# Altium PCB PCB1.PcbDoc (part 1 of 3)
Units mm, origin at the board's own origin, x right, y up, seen from the top; angles counter-clockwise.
Board outline 65.15 x 55.25 mm, 4 copper layers (Top Layer, Int1 (GND), Int2 (PWR), Bottom Layer), stack 1.369 mm thick; 135 components, 113 nets, 463 pads, 324 vias.
Unrouted connection lines stored in the file: 1.
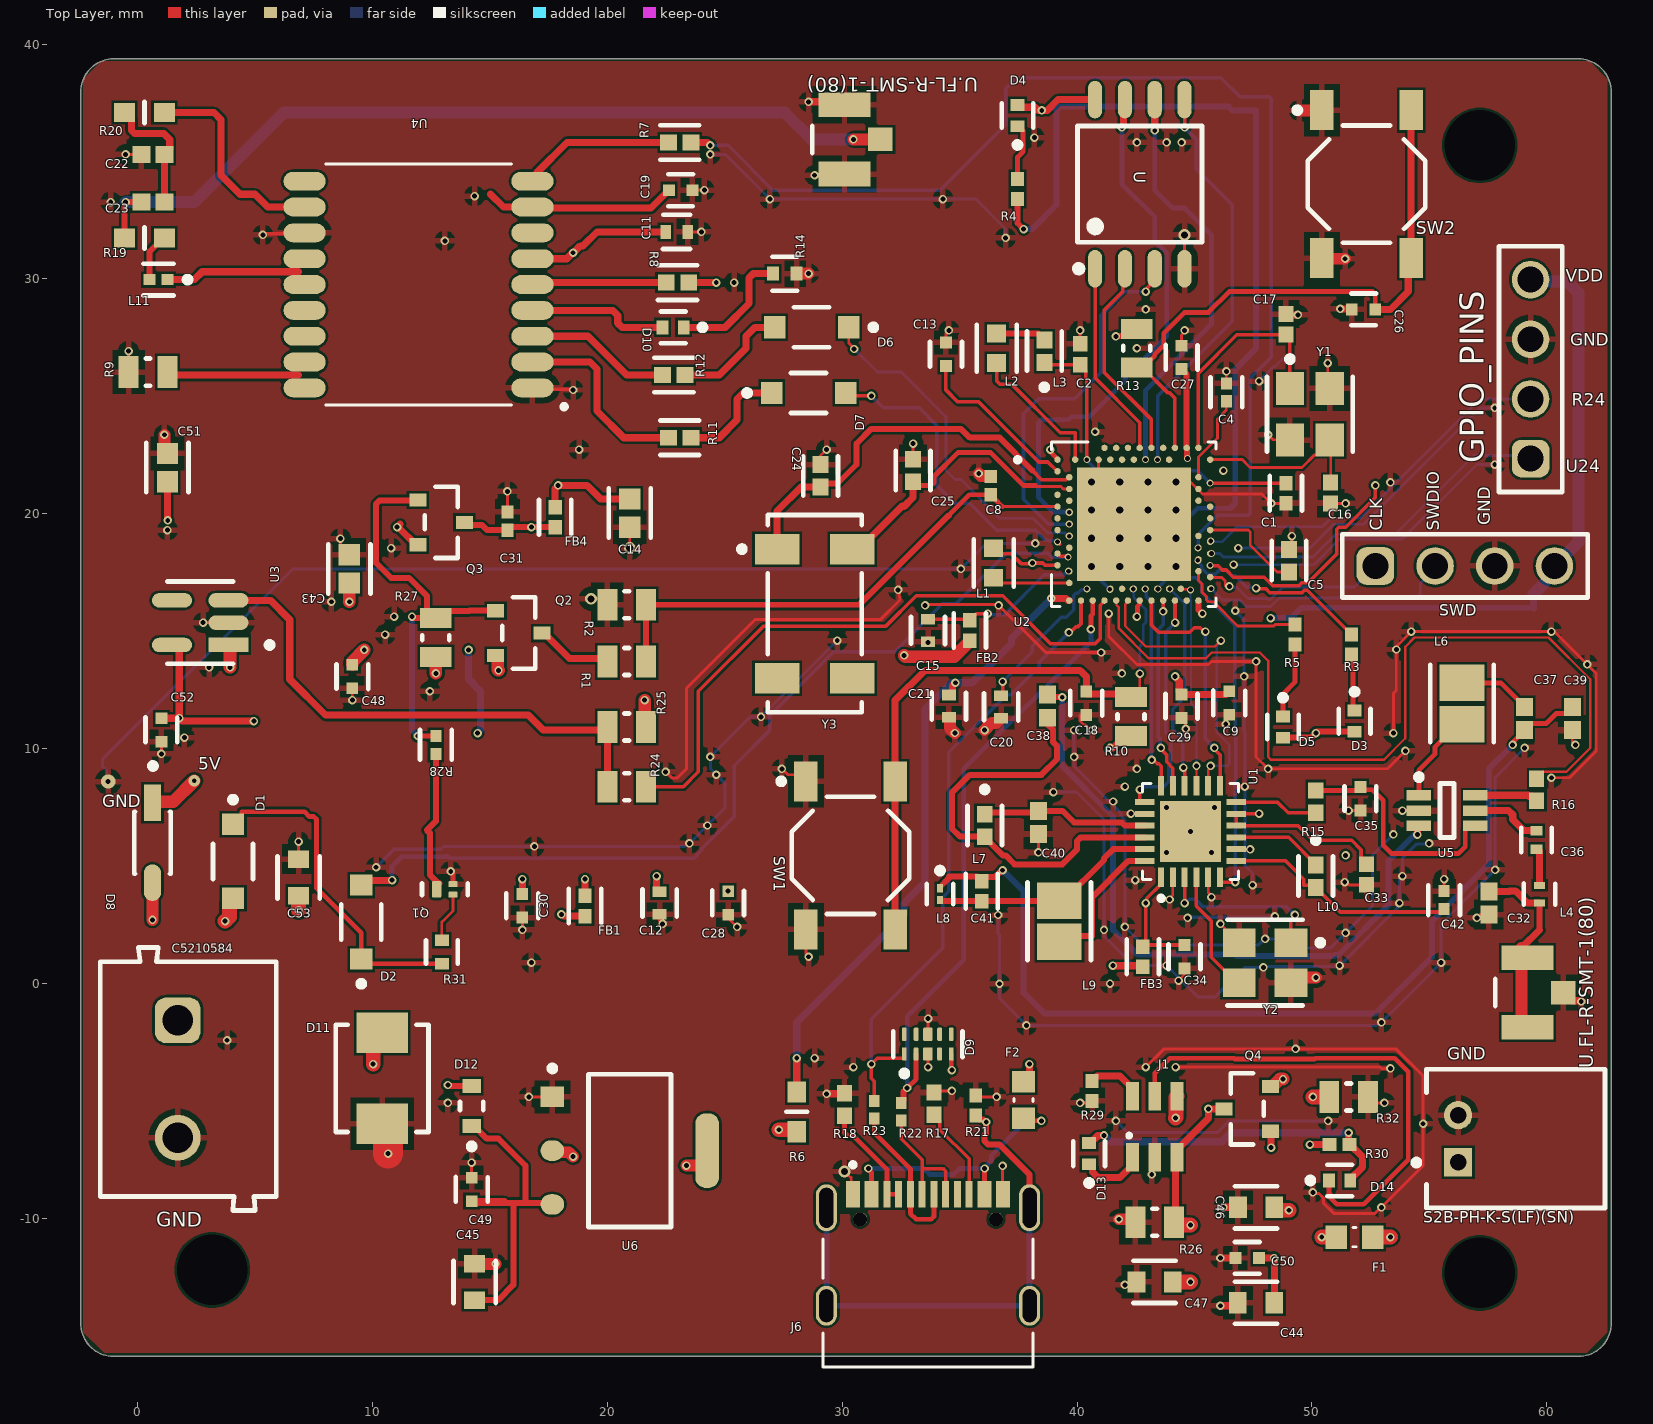
[diagram p0: Top Layer view]
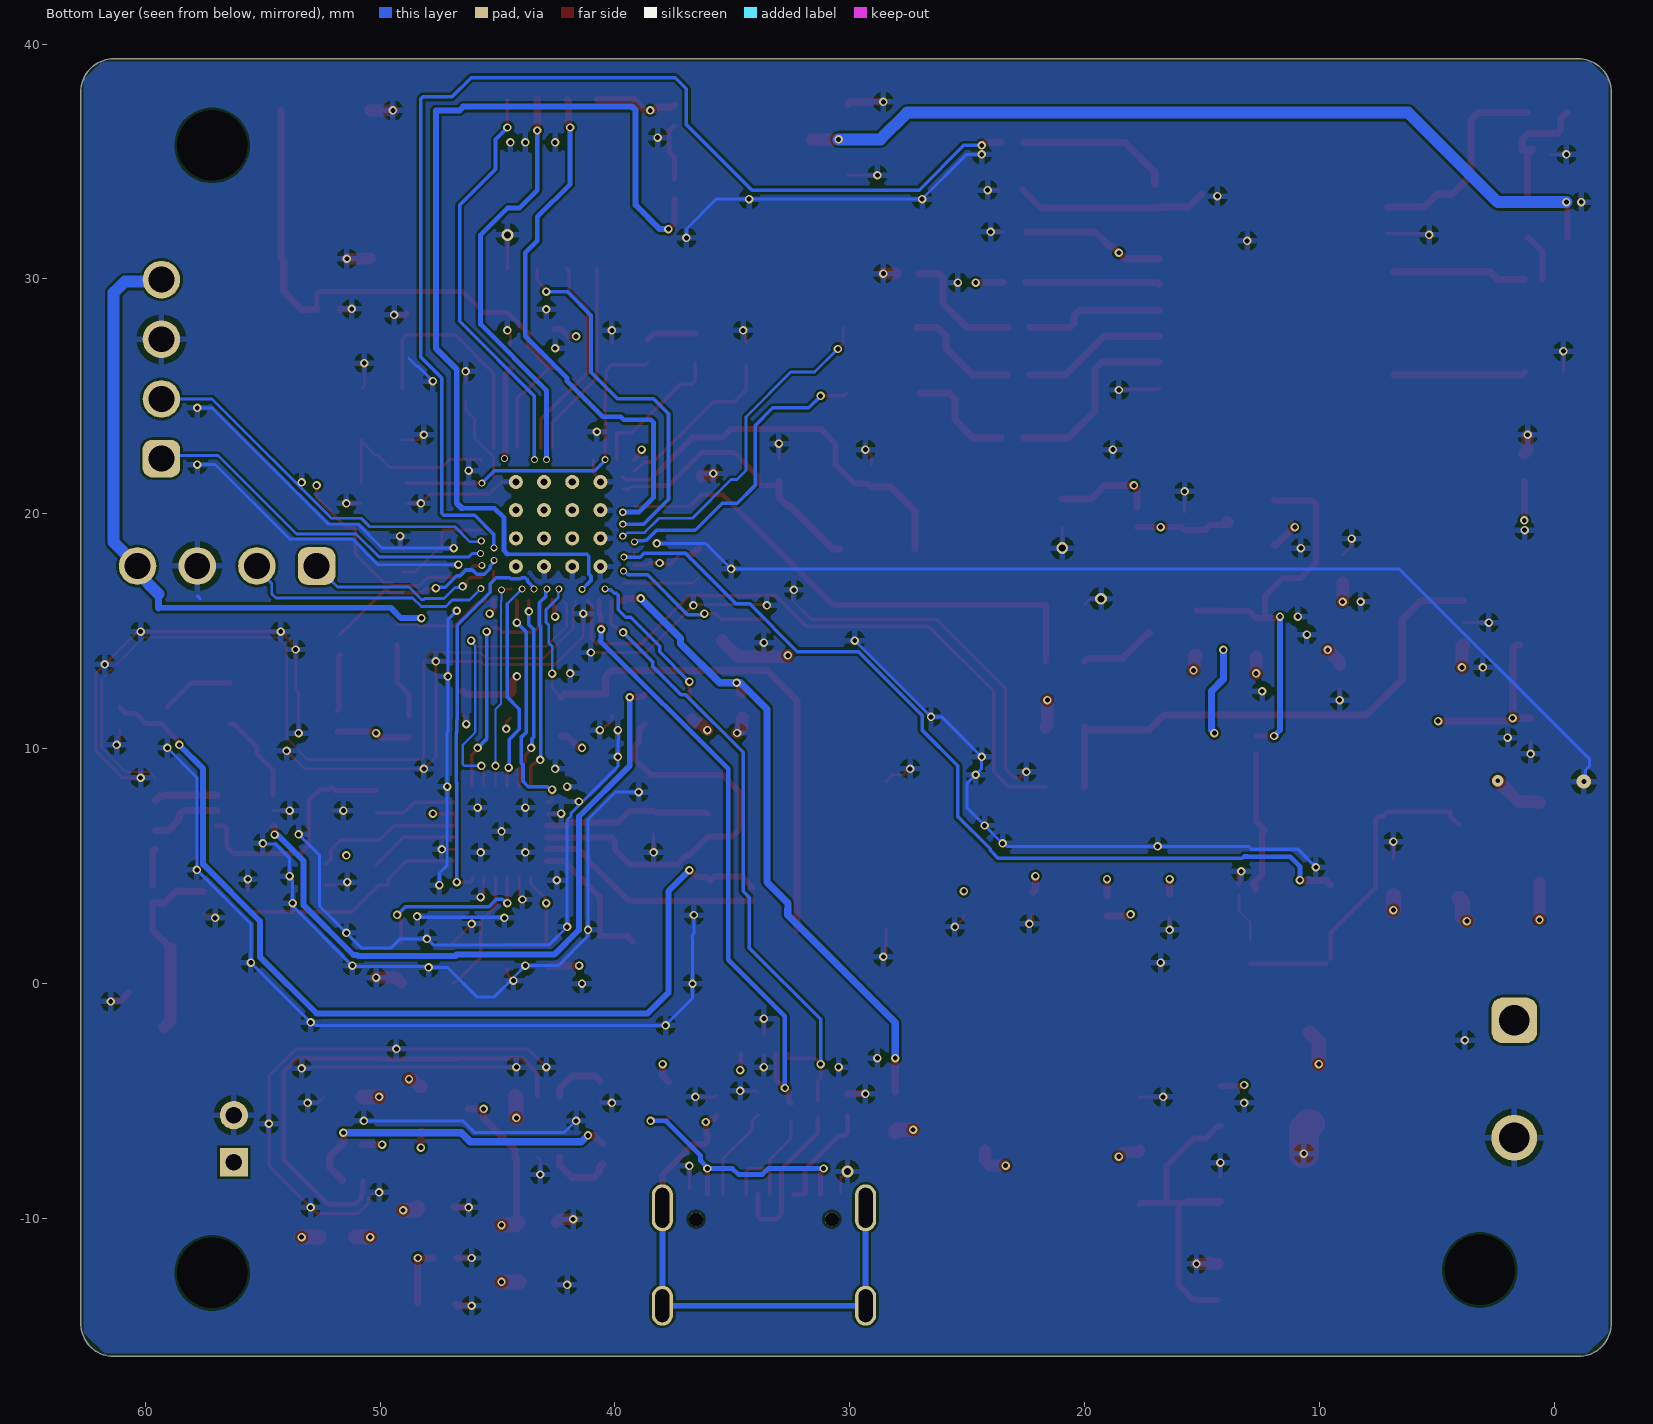
[diagram p1: Bottom Layer view, seen from below]
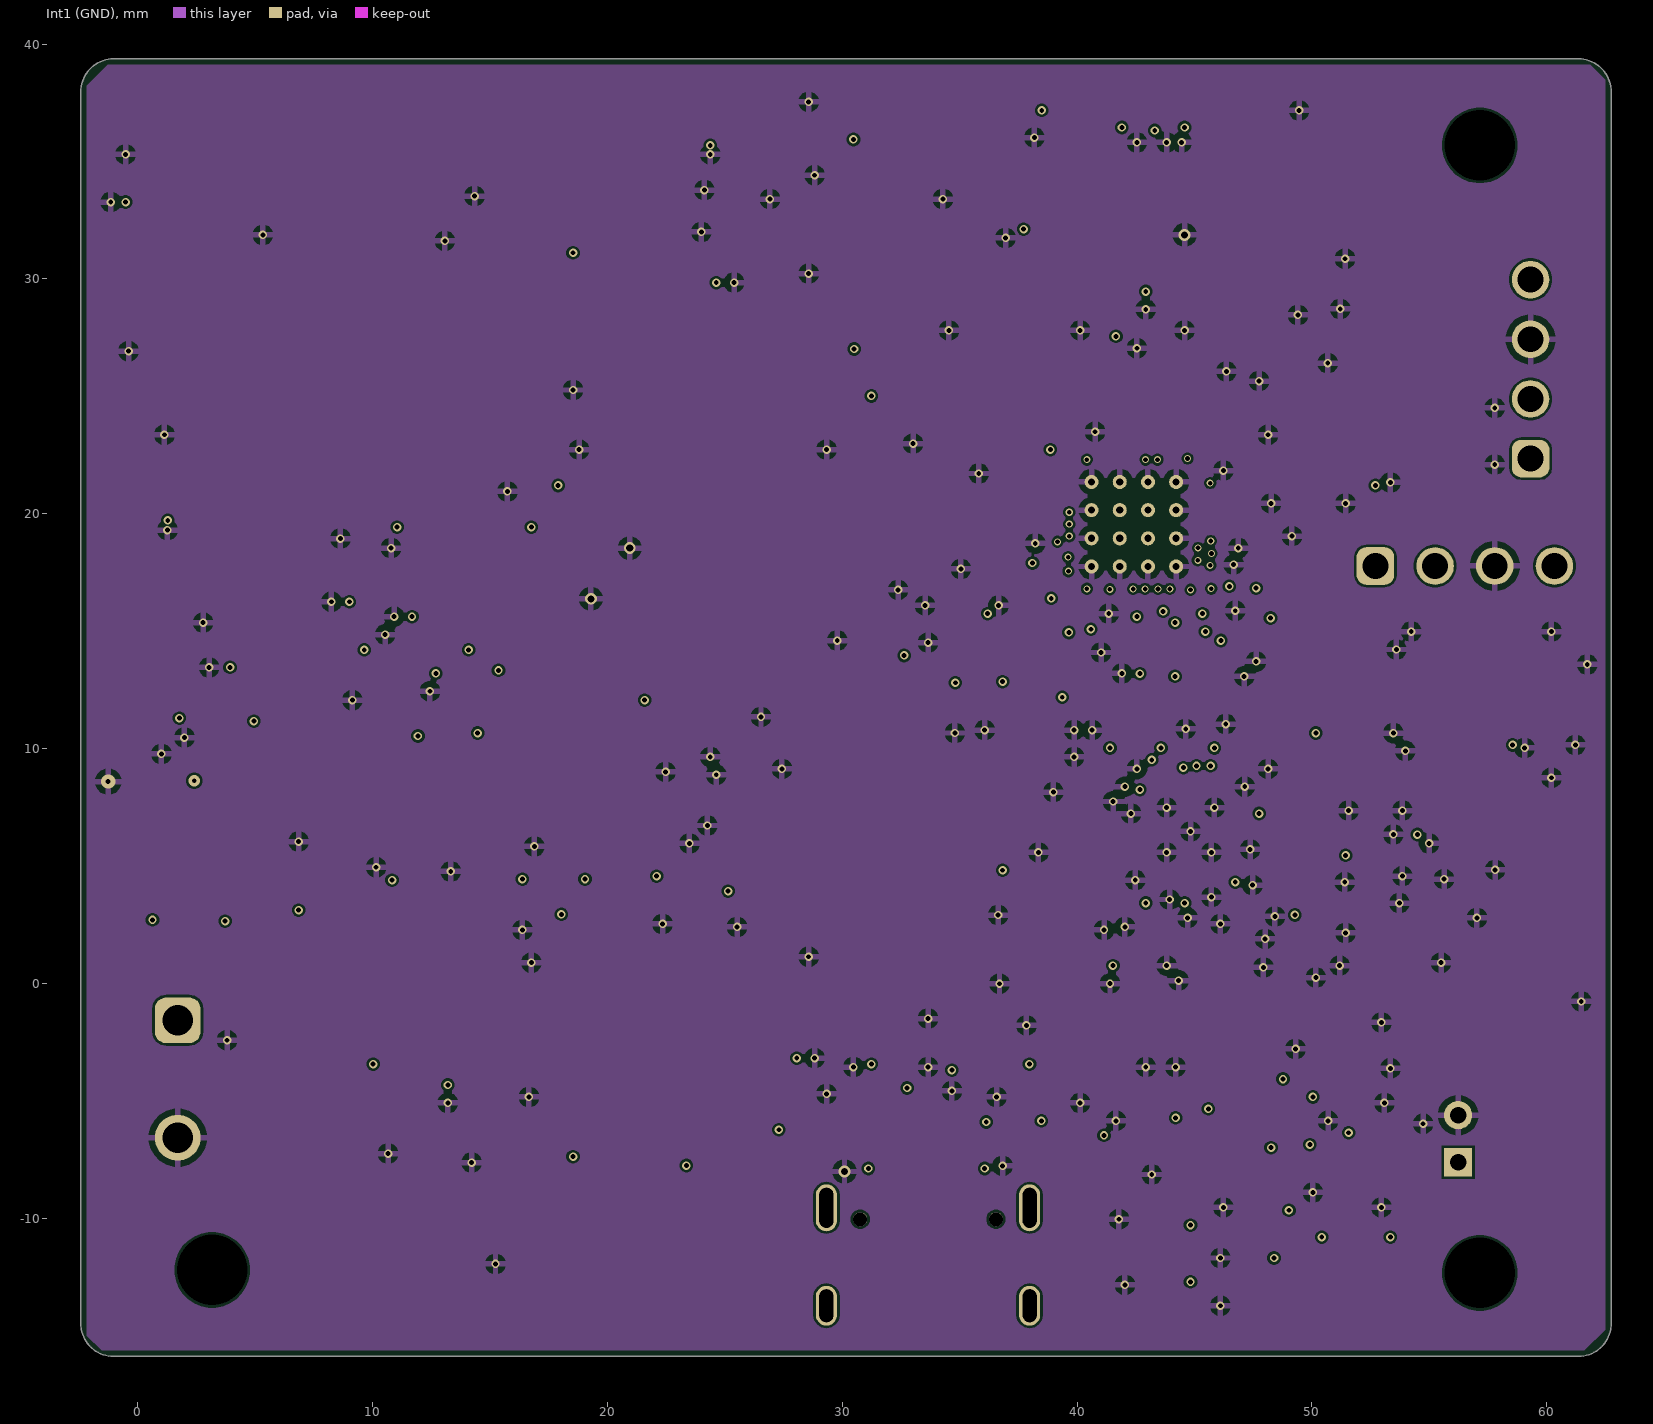
[diagram p2: Int1 (GND)]
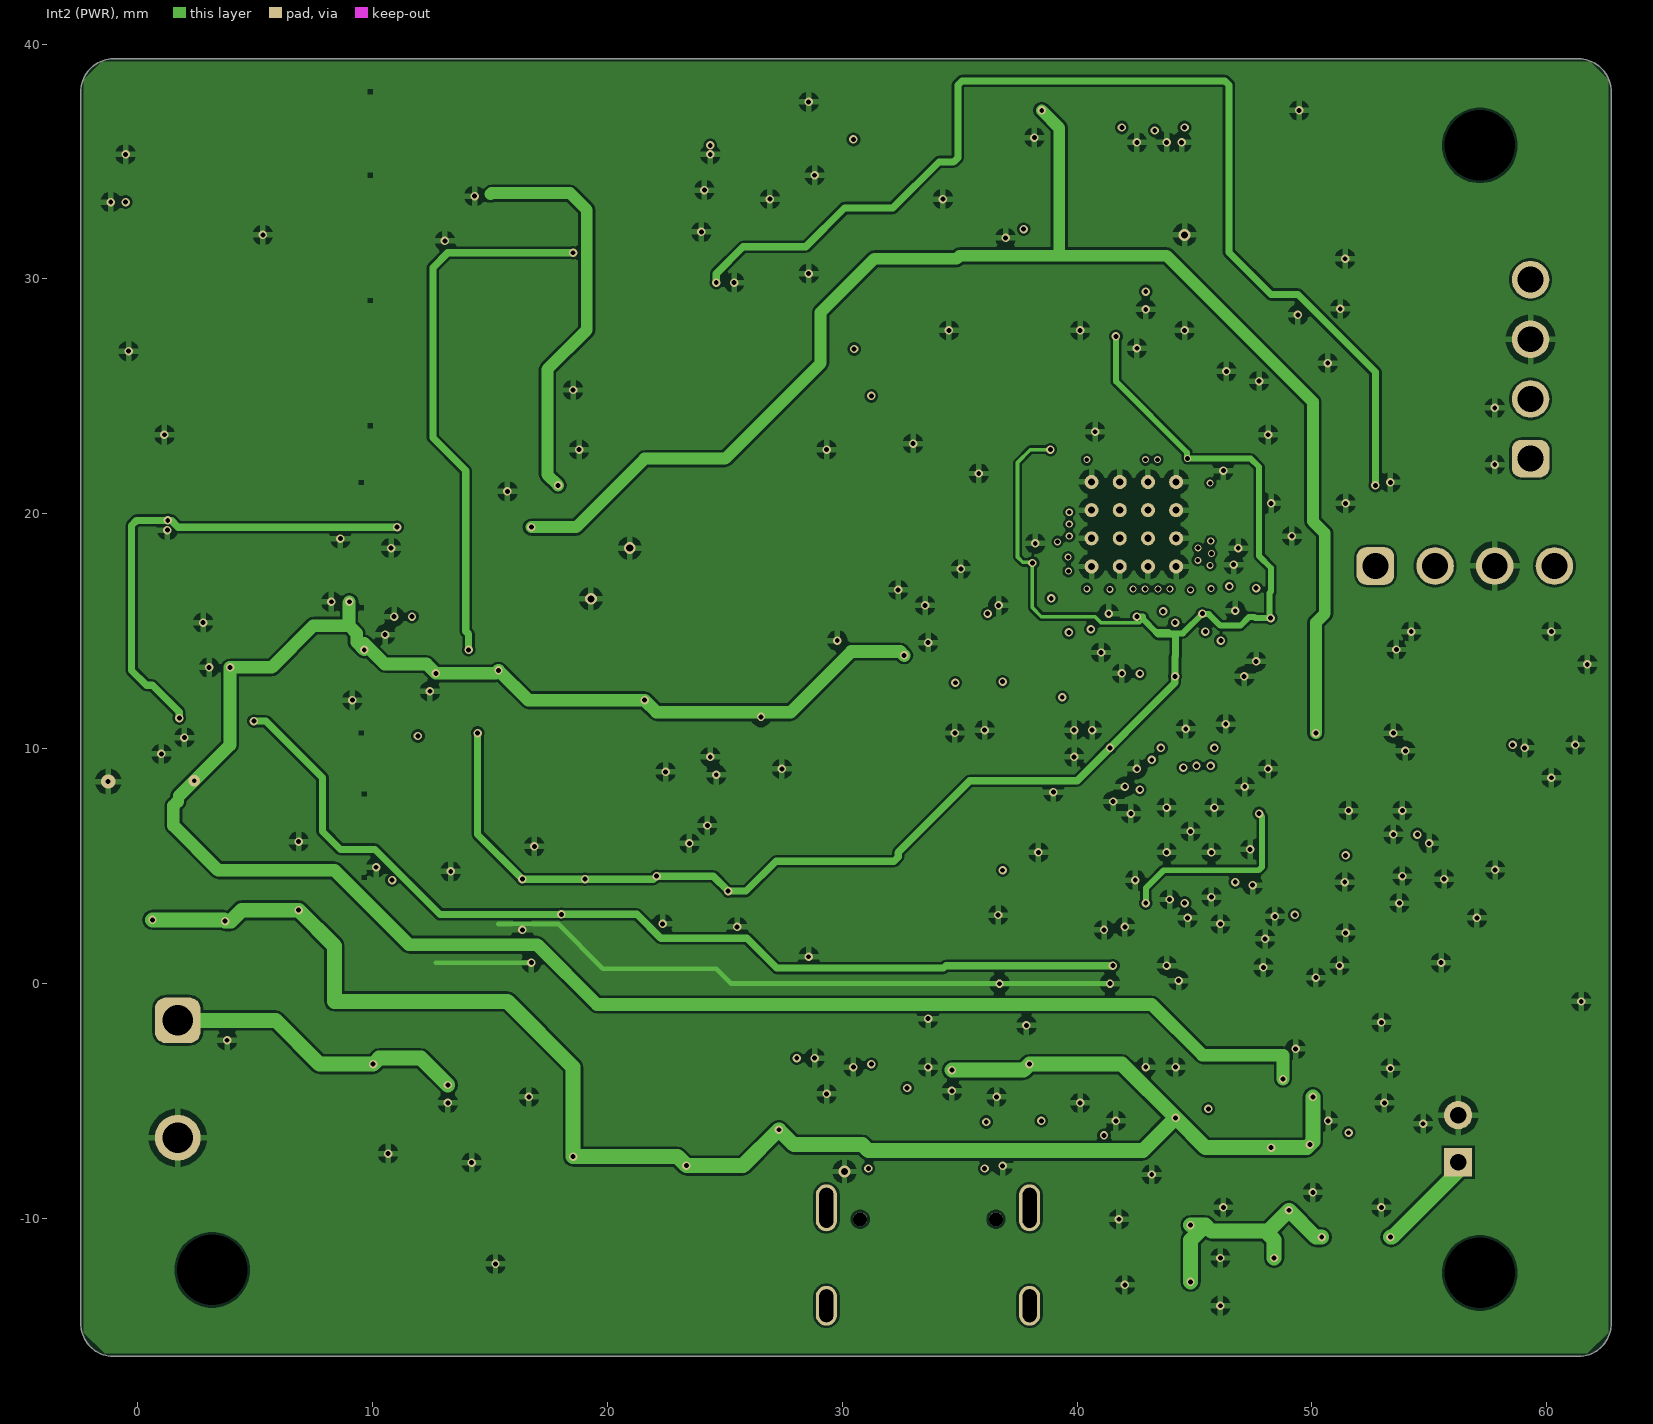
[diagram p3: Int2 (PWR)]

## Layer stack, top to bottom
Top Solder: solder mask 0.0254, SM-001, Dk 4
Top Layer: signal copper 0.035
Dielectric 1: prepreg 0.1295, PP-017, Dk 4.3
Dielectric 2: prepreg 0.1295, PP-017, Dk 4.3
Int1 (GND): signal copper 0.035
Dielectric 3: core 0.7112, Core-039, Dk 4.8
Int2 (PWR): signal copper 0.035
Dielectric 4: prepreg 0.1295, PP-017, Dk 4.3
Dielectric 5: prepreg 0.1295, PP-017, Dk 4.3
Bottom Layer: signal copper 0.035
Bottom Solder: solder mask 0.0254, SM-001, Dk 4

## Board outline
-2.413,-14.478 -2.413,37.973 cw(c-1.016,37.973) -1.016,39.37 61.341,39.37 cw(c61.341,37.973) 62.738,37.973 62.738,-14.478 cw(c61.341,-14.478) 61.341,-15.875 -1.016,-15.875 cw(c-1.016,-14.478)

## Design rules (kind name [scope] priority, off if disabled: settings)
Clearance Clearance_1 [All] p1: gap=0.1 ignorepadtopadclearanceinfootprint=FALSE
Clearance [All] p2: gap=0.1 ignorepadtopadclearanceinfootprint=TRUE
DiffPairsRouting [All] p1: maxlimit=0.254 minlimit=0.25 mostfreqgap=0.254 toplayer_minwidth=0.09 toplayer_maxwidth=0.281 toplayer_prefwidth=0.1 midlayer1_minwidth=0.09 midlayer1_maxwidth=0.281 midlayer1_prefwidth=0.1 midlayer2_minwidth=0.09 midlayer2_maxwidth=0.281 midlayer2_prefwidth=0.1 bottomlayer_minwidth=0.09 bottomlayer_maxwidth=0.281 bottomlayer_prefwidth=0.1 maxuncoupledlength=12.7
Length [All] p1: maxlimit=2540 minlimit=0
ParallelSegment [All] p1: limit=254 gap=0.1
PolygonConnect [All] p1: connectstyle=Relief reliefconductorwidth=0.254 reliefentries=4 polygonreliefangle="90 Angle" airgapwidth=0.254
RoomDefinition Sheet1 [InComponentClass('Sheet1')] p1: confinementstyle=ConfineIn formatcopy=TRUE lockcomponents=FALSE outline -60.706,-73.66 -9.906,-73.66 -9.906,-48.26 -60.706,-48.26
RoutingPriority [All] p1: routingpriority=1
RoutingVias [All] p1: holewidth=0.3 width=0.5 viastyle="Through Hole" minholewidth=0.15 minwidth=0.2 maxholewidth=0.2 maxwidth=0.7
SMDNeckDown [All] p1: percent=30.000
SolderMaskExpansion [All] p1: expansion=0.102 istentingtop=FALSE
StubLength [All] p1: limit=25.4
ViasUnderSMD [All] p1: allowed=TRUE
Width [InNet('5V')] p1: maxlimit=0.8 minlimit=0.1 preferedwidth=0.54 minimp=50.000000 maximp=50.000000 favimp=50.000000
28 further rules are at their usual default settings.

## Components (designator, comment, footprint, x,y, rotation, side; value= is the part's Value field where it differs from the comment)
C1 "GCM155R71E473KA55D" FP-GCM155-0_05-IPC_B 48.895,20.876 r270 top
C2 "GRM155R60J105KE19D" CAPC1005X55X25NL5T10 40.132,26.797 r270 top
C4 "GCM1555C1H101JA16D" FP-GCM155-0_05-IPC_C 46.355,25.173 r90 top
C5 "GCM1555C1H821JA16D" FP-GCM155-0_05-IPC_A 49.022,18.005 r90 top
C8 "GRM155R71C103KA01D" CAPC1005X55X25LL05T10 36.322,21.2 r270 top
C9 "CC0402KRX5R8BB104" FP-CC0402-MFG 46.482,11.946 r270 top value="100 nF"
C11 "GRM155R61A475MEAAD" FP-GRM155-0_15-MFG 22.954,32.004 r0 top
C12 "GRM155R61A475MEAAD" FP-GRM155-0_15-MFG 22.225,3.429 r270 top
C13 "CC0402KRX5R8BB104" FP-CC0402-MFG 34.417,26.797 r90 top value="100 nF"
C14 "GRM188R61A226ME15D" FP-GRM188-0_2-IPC_C 20.955,20.032 r270 top
C15 "GRM155R61A475MEAAD" FP-GRM155-0_15-MFG 33.655,15.034 r270 top
C16 "TCC0402COG120K500AT" CAPC1005X56X25NL10T15 50.8,20.887 r270 top
C17 "TCC0402COG120K500AT" CAPC1005X56X25NL10T15 48.895,28.067 r90 top
C18 "CC0402KRX5R8BB104" FP-CC0402-MFG 40.395,11.938 r270 top value="100 nF"
C19 "CC0402KRX5R8BB104" FP-CC0402-MFG 23.122,33.782 r0 top value="100 nF"
C20 "GRM155R61A475MEAAD" FP-GRM155-0_15-MFG 36.768,11.778 r270 top
C21 "GRM155R61A475MEAAD" FP-GRM155-0_15-MFG 34.544,11.811 r270 top
C22 "GRM1555C1H101JA01D" CAPC1005X55X25ML05T10 0.653,35.306 r0 top
C23 "GRM1555C1H101JA01D" CAPC1005X55X25ML05T10 0.653,33.274 r180 top
C24 "GJM1555C1H120GB01D" FP-GJM155-0_05-IPC_A 29.083,21.619 r270 top
C25 "GJM1555C1H120GB01D" FP-GJM155-0_05-IPC_A 33.02,21.844 r270 top
C26 "CC0402KRX5R8BB104" FP-CC0402-MFG 52.197,28.702 r180 top value="100 nF"
C27 "CC0402KRX5R8BB104" FP-CC0402-MFG 44.45,26.662 r90 top value="100 nF"
C28 "CC0402KRX5R8BB104" FP-CC0402-MFG 25.146,3.429 r270 top value="100 nF"
C29 "CC0402KRX5R8BB104" FP-CC0402-MFG 44.45,11.811 r270 top value="100 nF"
C30 "CC0402KRX5R8BB104" FP-CC0402-MFG 16.383,3.31 r270 top value="100 nF"
C31 "GRM155R71C103KA01D" CAPC1005X55X25LL05T10 15.748,19.694 r270 top
C32 "GRM155R71C123KA01D" CAPC1005X55X25ML05T10 57.531,3.429 r270 top
C33 "GRM155R60J105KE19D" CAPC1005X55X25NL5T10 52.324,4.64 r90 top
C34 "CC0402KRX5R8BB104" FP-CC0402-MFG 44.577,1.143 r270 top value="100 nF"
C35 "CC0402KRX5R8BB104" FP-CC0402-MFG 52.07,7.874 r270 top value="100 nF"
C36 "GCM1555C1H4R0CA16D" FP-GCM155-0_05-MFG 59.563,6.115 r90 top
C37 "GRM155R71H122KA01D" CAPC1005X55X25ML05T10 59.055,11.285 r270 top
C38 "GRM155R71H122KA01D" CAPC1005X55X25ML05T10 38.735,11.811 r270 top
C39 "GRM1555C1E100JA01D" CAPC1005X55X25ML05T10 61.087,11.285 r270 top
C40 "GRM1555C1E100JA01D" CAPC1005X55X25ML05T10 38.354,6.858 r90 top
C41 "GCM1555C1H8R0CA16D" FP-GCM155-0_05-IPC_B 35.941,3.937 r270 top
C42 "GRM155C80J474KE19D" FP-GRM155-0_05-IPC_C 55.626,3.556 r90 top
C43 "GRM188R61A226ME15D" FP-GRM188-0_2-IPC_C 9.017,17.653 r270 top
C44 "GRM188R61E106MA73D" FP-GRM188-0_2-MFG 47.625,-13.589 r180 top
C45 "GRM188R61E106MA73D" FP-GRM188-0_2-MFG 14.351,-12.7 r90 top
C46 "GRM188R61E106MA73D" FP-GRM188-0_2-MFG 47.625,-9.525 r180 top
C47 "GRM188R61E106MA73D" FP-GRM188-0_2-MFG 43.307,-12.7 r180 top
C48 "CC0402KRX5R8BB104" FP-CC0402-MFG 9.144,13.073 r90 top value="100 nF"
C49 "CC0402KRX5R8BB104" FP-CC0402-MFG 14.224,-8.763 r90 top value="100 nF"
C50 "CC0402KRX5R8BB104" FP-CC0402-MFG 47.244,-11.684 r180 top value="100 nF"
C51 "GRM188R61A226ME15D" FP-GRM188-0_2-IPC_C 1.27,21.971 r90 top
C52 "CC0402KRX5R8BB104" FP-CC0402-MFG 1.016,10.795 r270 top value="100 nF"
C53 "GRM188R61E106MA73D" FP-GRM188-0_2-MFG 6.858,4.521 r90 top
C5210584 "691102710002" 691102710002 2.159,-4.064 r270 top (schematic designator "12V DC")
D1 "1N4148W" FP-SOD123-MFG 4.064,5.207 r270 top value=2pF
D2 "1N4148W" FP-SOD123-MFG 9.525,2.616 r90 top value=2pF
D3 "TJ-S1005CL4T5ALC7K-A5" FP-SML-P11MTT86-MFG 51.816,11.176 r270 top
D4 "TJ-S1005CL4T5ALC2R-A5" FP-SML-P11MTT86-MFG 37.465,36.957 r90 top
D5 "TJ-S1005SW4TGLC6B-A5" FP-SML-P11MTT86-MFG 48.768,10.922 r270 top
D6 "1N4148W" FP-SOD123-MFG 28.702,27.94 r180 top value=2pF
D7 "1N4148W" FP-SOD123-MFG 28.575,25.146 r0 top value=2pF
D8 "1N5819HW-7-F" FP-SOD123-IPC_A 0.635,5.996 r270 top
D9 "TPD4E02B04DQAR" FP-DQA0010A-MFG 33.647,-2.576 r90 top
D10 "TJ-S1005CL4T5ALC7K-A5" FP-SML-P11MTT86-MFG 22.802,27.94 r180 top
D11 "SMBJ15CA-E3/52" FP-95401-CA-MFG 10.414,-4.032 r90 top
D12 "SD0603S040S0R2" FP-SD0603-MFG 14.224,-5.207 r90 top
D13 "TJ-S1005CL4T5ALC2R-A5" FP-SML-P11MTT86-MFG 40.513,-7.239 r90 top
D14 "SML-P11MTT86" FP-SML-P11MTT86-MFG 51.181,-8.382 r0 top
F1 "ERBRE1R00V" FUSC1608X60N 51.816,-10.795 r180 top
F2 "ERBRE1R00V" FUSC1608X60N 37.719,-4.953 r90 top
FB1 "BLM15AG102SN1D" FP-BLM15-0_05-IPC_B 19.05,3.302 r90 top
FB2 "BLM15AG102SN1D" FP-BLM15-0_05-IPC_B 35.433,15.034 r270 top
FB3 "BLM15AG102SN1D" FP-BLM15-0_05-IPC_B 42.799,1.143 r90 top
FB4 "BLM15AG102SN1D" FP-BLM15-0_05-IPC_B 17.78,19.86 r90 top
GPIO_PINS "61300411121" 61300411121 59.309,26.162 r90 top
J1 "TP4057" SOT23-6 43.307,-6.096 r0 top
J6 "TYPE-C-31-M-12" HRO_TYPE-C-31-M-12 33.655,-13.716 r0 top
L1 "MCL1608S100MT" FP-LQM18FN_00-IPC_C 36.449,17.907 r270 top
L2 "MCL1608S100MT" FP-LQM18FN_00-IPC_C 36.576,27.051 r90 top
L3 "LQG15HZ15NH02D" FP-LQG15HH_02-IPC_A 38.608,26.924 r90 top
L4 "FCI2012F-R39K" FP-LQW04CA_00-MFG 59.69,3.81 r90 top
L6 "MLP2016V2R2MT0S1" FP-MLP2016M-IPC_A 56.388,11.925 r90 top
L7 "LQG15HZ15NH02D" FP-LQG15HH_02-IPC_A 36.068,6.731 r270 top
L8 "LQP03TN4N0B02D" FP-LQP03TG_02-IPC_C 34.163,3.81 r270 top
L9 "MLP2016V2R2MT0S1" FP-MLP2016M-IPC_A 39.243,2.654 r270 top
L10 "LQG15HZ15NH02D" FP-LQG15HH_02-IPC_A 50.165,4.572 r270 top
L11 "LQG15HH47NJ02D" FP-LQG15HH_02-IPC_C 0.891,29.972 r180 top
Q1 "PBSS2515M,315" FP-SOT883B-MFG 13.081,4.013 r180 top
Q2 "SI2333-HXY" FP-S-03946-MFG 16.231,14.922 r0 top
Q3 "SI2333-HXY" FP-S-03946-MFG 12.929,19.639 r0 top
Q4 "SI2333-HXY" FP-S-03946-MFG 47.244,-5.334 r180 top
R1 "ERJ6ENF4992V" RESC2013X50X30LL20T20 20.828,13.716 r180 top
R2 "ERJ6ENF4992V" RESC2013X50X30LL20T20 20.828,16.129 r0 top
R3 "RT0402BRE072KL" RESC1005X40X25NL05T10 51.689,14.434 r270 top
R4 "RT0402BRE072KL" RESC1005X40X25NL05T10 37.465,33.826 r90 top
R5 "RT0402BRE072KL" RESC1005X40X25NL05T10 49.276,14.859 r270 top
R6 "AC0603FR-070RL" FP-AC0603-0_55-MFG 28.067,-5.461 r90 top
R7 "AC0402JR-07100RL" FP-AC0402-IPC_A 23.085,35.814 r180 top
R8 "AC0402JR-07100RL" FP-AC0402-IPC_A 22.987,29.845 r180 top
R9 "ERJ6ENF4992V" RESC2013X50X30LL20T20 0.445,26.035 r0 top
R10 "ERJ6ENF4992V" RESC2013X50X30LL20T20 42.299,11.367 r270 top
R11 "AC0402JR-07100RL" FP-AC0402-IPC_A 23.085,23.241 r0 top
R12 "AC0402JR-07100RL" FP-AC0402-IPC_A 22.831,25.908 r0 top
R13 "ERJ6ENF4992V" RESC2013X50X30LL20T20 42.545,27.051 r90 top
R14 "AF0402JR-071KL" FP-AF0402-MFG 27.559,30.226 r0 top
R15 "RC0402FR-07100RL" RESC1005X40X25ML05T10 50.165,7.747 r90 top
R16 "RC0402FR-07100RL" RESC1005X40X25ML05T10 59.563,8.255 r270 top
R17 "RC0402JR-075K1L" RESC1005X40X25ML05T10 33.909,-5.113 r90 top
R18 "RC0402JR-075K1L" RESC1005X40X25ML05T10 30.099,-5.146 r90 top
R19 "AC0603FR-070RL" FP-AC0603-0_55-MFG 0.293,31.75 r180 top
R20 "AC0603FR-070RL" FP-AC0603-0_55-MFG 0.293,37.084 r180 top
R21 "RC0402FR-071ML" RESC1005X40X25NL05T10 35.687,-5.196 r270 top
R22 "RC0402FR-0722RL" RESC1005X40X25LL05T10 32.512,-5.455 r90 top
R23 "RC0402FR-0722RL" RESC1005X40X25LL05T10 31.369,-5.373 r90 top
R24 "ERJ6ENF4992V" RESC2013X50X30LL20T20 20.828,8.382 r0 top
R25 "ERJ6ENF4992V" RESC2013X50X30LL20T20 20.828,10.922 r0 top
R26 "ERJ6ENF4992V" RESC2013X50X30LL20T20 43.307,-10.16 r0 top
R27 "ERJ6ENF4992V" RESC2013X50X30LL20T20 12.7,14.732 r270 top
R28 "FRC0402J102 TS" FP-AC0402-IPC_C 12.7,10.16 r270 top
R29 "RT0402BRE072KL" RESC1005X40X25NL05T10 40.64,-4.572 r270 top
R30 "RC0402JR-07330RL" RESC1005X40X25NL05T10 51.181,-6.858 r0 top
R31 "AC0402FR-0710KL" FP-AC0402-MFG 12.954,1.346 r270 top
R32 "ERJ6ENF4992V" RESC2013X50X30LL20T20 51.562,-4.826 r0 top
S2B-PH-K-S(LF)(SN) "S2B-PH-K-S(LF)(SN)" JST-S2B-PH-K-S_V 58.674,-6.604 r90 top (schematic designator "3.7 V CELL")
SW1 "TL3342F160QG" ESWI-TL3342F160QG_V 30.353,5.461 r0 top
SW2 "TL3342F160QG" ESWI-TL3342F160QG_V 52.324,34.036 r0 top
SWD "61300411121" 61300411121 56.515,17.78 r0 top
U "W25Q32JVSSIQ" SOIC127P790X216-8N 42.672,34.036 r90 top
U1 "SX1262IMLTRT" QFN50P400X400X100-25N 44.831,6.477 r90 top
U2 "NRF52840-QIAA-R" XCVR_NRF52840-QIAA-R 42.418,19.558 r0 top locked
U3 "AP2112K-3.3TRG1" FP-SOT25-IPC_A 2.667,15.367 r180 top
U4 "L76KB-A58" XCVR_L76 11.962,29.763 r180 top
U5 "PE4259-63" PERE-SC-70-6_M 55.753,7.366 r0 top
U6 "AMS1117-5.0" FP-AMS1117-IPC_C 20.955,-7.112 r0 top
U.FL-R-SMT-1(80) "U.FL-R-SMT-1(10)" FP-U_FL-R-SMT-1_10-MFG 59.182,-0.381 r270 top (schematic designator "LORA ANT")
U.FL-R-SMT-1(80) "U.FL-R-SMT-1(10)" FP-U_FL-R-SMT-1_10-MFG 30.099,35.941 r270 top (schematic designator "GPS ANT")
Y1 "XXDBBCNANF-32.000000MHZ" FP-ABM8G-MFG 49.911,24.238 r270 top
Y2 "XXDBBCNANF-32.000000MHZ" FP-ABM8G-MFG 48.006,0.889 r180 top
Y3 "ABS25-32.768KHZ-T" FP-ABS25-MFG 28.829,15.748 r270 top

## Footprints (in the part's own frame and the unit in brackets; to place one, negate y for a bottom-side part, rotate by r counter-clockwise, add the part's x,y. Pads: shape width x height; smd on the part's side, far side on the other; paste and mask are expansions set on the pad)
61300411121 [mm] "Pin Header, pitch 2.54 mm, THT, Vertical, single row, 4p"
  rrect50% 1.6x1.6 hole 1.1: 1(-3.81,0)
  round 1.6 hole 1.1: 2(-1.27,0) 3(1.27,0) 4(3.81,0)
  silkscreen extent -5.23,-1.35 5.23,1.35, body extent -5.08,-1.27 5.08,1.27, height 8.57
691102710002 [mm] "5,00mm - modular - blue - Horizontal entry with pressure clamp - 9,9 mm height - 02p"
  rrect50% 1.95x1.95 hole 1.3: 1(-2.5,-0.45)
  round 1.95 hole 1.3: 2(2.5,-0.45)
  silkscreen extent -5.6,-3.75 5.6,3.75, body extent -5.6,-3.75 5.6,3.75, height 9.96
CAPC1005X55X25LL05T10 [mm] "Chip Capacitor, 2-Leads, Body 1.05x0.55mm, IPC High Density"
  rect 0.56x0.52 smd: 1(-0.39,0) 2(0.39,0)
  body extent -0.53,-0.28 0.53,0.28, height 0.55
CAPC1005X55X25ML05T10 [mm] "Chip Capacitor, 2-Leads, Body 1.00x0.50mm, IPC Low Density"
  rect 0.76x0.72 smd: 1(-0.49,0) 2(0.49,0)
  body extent -0.53,-0.28 0.53,0.27, height 0.55
CAPC1005X55X25NL5T10 [mm] "Chip Capacitor, 2-Leads, Body 1.05x0.55mm, IPC Medium Density"
  rect 0.66x0.62 smd: 1(-0.44,0) 2(0.44,0)
  body extent -0.53,-0.28 0.53,0.28, height 0.55
CAPC1005X56X25NL10T15 [mm] "Chip Capacitor, 2-Leads, Body 1.00x0.50mm, IPC Medium Density"
  rect 0.68x0.64 smd: 1(-0.44,0) 2(0.44,0)
  body extent -0.55,-0.3 0.55,0.3, height 0.56
ESWI-TL3342F160QG_V [mm] "SMD, 4-Leads, Body 5x5mm, Pitch 6.3mm"
  rect 1x1.7 smd: 1(-1.9,3.15) 2(-1.9,-3.15) 3(1.9,3.15) 4(1.9,-3.15)
  silkscreen extent -3.07,-2.5 2.5,3.27, body extent -2.5,-2.5 2.5,2.5, height 0.8
FP-95401-CA-MFG [mm]
  rect 1.716x2.18 smd paste+0 mask+0: 1(-1.937,0) 2(1.937,0)
  silkscreen extent -2.28,-1.97 2.28,1.97, body extent -2.9,-2.07 2.89,2.07, height 0.25
FP-ABM8G-MFG [mm]
  rect 1.4x1.2 smd paste+0 mask+0: 1(-1.1,-0.85) 2(1.1,-0.85) 3(1.1,0.85) 4(-1.1,0.85)
  silkscreen extent -2.47,-1.83 1.6,1.83, body extent -1.9,-1.55 1.9,1.55, height 0.25
FP-ABS25-MFG [mm]
  rect 1.3x1.9 smd paste+0 mask+0: 1(-2.75,-1.6) 2(2.75,-1.6) 3(2.75,1.6) 4(-2.75,1.6)
  silkscreen extent -4.2,-3.22 4.2,2, body extent -4.3,-2.65 4.3,2.65, height 0.25
FP-AC0402-IPC_A [mm]
  rect 0.715x0.672 smd paste+0 mask+0: 1(-0.479,0) 2(0.479,0)
  silkscreen extent -0.84,-0.74 0.84,0.74, body extent -1.04,-0.54 1.04,0.54, height 0.25
FP-AC0402-IPC_C [mm]
  rect 0.515x0.472 smd paste+0 mask+0: 1(-0.379,0) 2(0.379,0)
  silkscreen extent -0.64,-0.67 0.64,0.67, body extent -0.74,-0.38 0.74,0.38, height 0.25
FP-AC0402-MFG [mm]
  rect 0.5x0.6 smd paste+0 mask+0: 1(-0.5,0) 2(0.5,0)
  silkscreen extent -0.5,-0.67 0.5,0.67, body extent -0.85,-0.4 0.85,0.4, height 0.25
FP-AC0603-0_55-MFG [mm]
  rect 0.9x0.8 smd paste+0 mask+0: 1(-0.85,0) 2(0.85,0)
  silkscreen extent 0,-0.45 0,0.45, body extent -1.4,-0.55 1.4,0.55, height 0.25
FP-AF0402-MFG [mm]
  rect 0.5x0.6 smd paste+0 mask+0: 1(-0.5,0) 2(0.5,0)
  silkscreen extent -0.53,-0.72 0.53,0.72, body extent -0.85,-0.4 0.85,0.4, height 0.25
FP-AMS1117-IPC_C [mm]
  rect 1.004x0.872 smd paste+0 mask+0: 1(-3.295,2.29)
  rrect100% 1.004x0.872 smd paste+0 mask+0: 2(-3.295,0) 3(-3.295,-2.29)
  rrect87% 1.004x3.182 smd paste+0 mask+0: 4(3.295,0)
  silkscreen extent -3.42,-3.25 1.75,3.62, body extent -3.9,-3.35 3.9,3.35, height 0.25
FP-BLM15-0_05-IPC_B [mm]
  rect 0.615x0.572 smd paste+0 mask+0: 1(-0.429,0) 2(0.429,0)
  silkscreen extent -0.74,-0.69 0.74,0.69, body extent -0.89,-0.44 0.89,0.44, height 0.25
FP-CC0402-MFG [mm]
  rect 0.5x0.5 smd paste+0 mask+0: 1(-0.5,0) 2(0.5,0)
  silkscreen extent -0.53,-0.68 0.52,0.67, body extent -0.87,-0.48 0.87,0.48, height 0.25
FP-DQA0010A-MFG [mm]
  rrect50% 0.565x0.2 smd paste+0 mask+0: 1(-0.417,1) 2(-0.417,0.5) 4(-0.417,-0.5) 5(-0.417,-1) 6(0.417,-1) 7(0.417,-0.5) 9(0.417,0.5) 10(0.417,1)
  rrect25% 0.565x0.4 smd paste-1000 mask+0: 3(-0.417,0) 8(0.417,0)
  silkscreen extent -1.37,-1.47 0.55,1.48, body extent -0.8,-1.4 0.8,1.4, height 0.25
FP-GCM155-0_05-IPC_A [mm]
  rect 0.715x0.672 smd paste+0 mask+0: 1(-0.479,0) 2(0.479,0)
  silkscreen extent -0.84,-0.74 0.84,0.74, body extent -1.04,-0.54 1.04,0.54, height 0.25
FP-GCM155-0_05-IPC_B [mm]
  rect 0.615x0.572 smd paste+0 mask+0: 1(-0.429,0) 2(0.429,0)
  silkscreen extent -0.74,-0.69 0.74,0.69, body extent -0.89,-0.44 0.89,0.44, height 0.25
FP-GCM155-0_05-IPC_C [mm]
  rect 0.515x0.472 smd paste+0 mask+0: 1(-0.379,0) 2(0.379,0)
  silkscreen extent -0.64,-0.67 0.64,0.67, body extent -0.74,-0.38 0.74,0.38, height 0.25
FP-GCM155-0_05-MFG [mm]
  rect 0.4x0.5 smd paste+0 mask+0: 1(-0.4,0) 2(0.4,0)
  silkscreen extent -0.52,-0.65 0.53,0.65, body extent -0.7,-0.38 0.7,0.38, height 0.25
FP-GJM155-0_05-IPC_A [mm]
  rect 0.715x0.672 smd paste+0 mask+0: 1(-0.479,0) 2(0.479,0)
  silkscreen extent -0.84,-0.74 0.84,0.74, body extent -1.04,-0.54 1.04,0.54, height 0.25
FP-GRM155-0_05-IPC_C [mm]
  rect 0.515x0.472 smd paste+0 mask+0: 1(-0.379,0) 2(0.379,0)
  silkscreen extent -0.64,-0.68 0.64,0.68, body extent -0.74,-0.38 0.74,0.38, height 0.25
FP-GRM155-0_15-MFG [mm]
  rect 0.45x0.6 smd paste+0 mask+0: 1(-0.475,0) 2(0.475,0)
  silkscreen extent -0.58,-0.73 0.57,0.73, body extent -0.8,-0.43 0.8,0.43, height 0.25
FP-GRM188-0_2-IPC_C [mm]
  rect 0.905x0.906 smd paste+0 mask+0: 1(-0.601,0) 2(0.601,0)
  silkscreen extent -1.05,-0.9 1.05,0.9, body extent -1.15,-0.6 1.15,0.6, height 0.25
FP-GRM188-0_2-MFG [mm]
  rect 0.75x0.9 smd paste+0 mask+0: 1(-0.775,0) 2(0.775,0)
  silkscreen extent -0.9,-0.9 0.9,0.9, body extent -1.25,-0.6 1.25,0.6, height 0.25
FP-LQG15HH_02-IPC_A [mm]
  rect 0.715x0.672 smd paste+0 mask+0: 1(-0.479,0) 2(0.479,0)
  silkscreen extent -1.66,-0.74 0.84,0.74, body extent -1.04,-0.54 1.04,0.54, height 0.25
FP-LQG15HH_02-IPC_C [mm]
  rect 0.515x0.472 smd paste+0 mask+0: 1(-0.379,0) 2(0.379,0)
  silkscreen extent -1.36,-0.67 0.64,0.68, body extent -0.74,-0.38 0.74,0.38, height 0.25
FP-LQM18FN_00-IPC_C [mm]
  rect 0.758x0.812 smd paste+0 mask+0: 1(-0.627,0) 2(0.627,0)
  silkscreen extent -1.01,-0.85 1.01,0.85, body extent -1.11,-0.55 1.11,0.55, height 0.25
FP-LQP03TG_02-IPC_C [mm]
  rect 0.354x0.263 smd paste+0 mask+0: 1(-0.254,0) 2(0.254,0)
  silkscreen extent -1.12,-0.56 0.43,0.56, body extent -0.53,-0.27 0.53,0.26, height 0.25
FP-LQW04CA_00-MFG [mm]
  rect 0.3x0.48 smd paste+0 mask+0: 1(-0.375,0) 2(0.375,0)
  silkscreen extent -0.46,-0.67 0.45,0.67, body extent -0.63,-0.38 0.63,0.38, height 0.25
FP-MLP2016M-IPC_A [mm]
  rect 1.554x1.906 smd paste+0 mask+0: 1(-0.876,0) 2(0.876,0)
  silkscreen extent -1.65,-1.35 1.65,1.35, body extent -2.15,-1.45 2.15,1.45, height 0.25
FP-S-03946-MFG [mil]
  rect 29x22 smd paste+0 mask+0: 1(-39,37.5) 2(-39,-37.5) 3(39,0)
  silkscreen extent -28,-60 28,60, body extent -57,-64 57,64, height 10
FP-SD0603-MFG [mm]
  rect 0.6x0.8 smd paste+0 mask+0: 1(-0.85,0) 2(0.85,0)
  silkscreen extent -1.85,-0.5 0.18,0.5, body extent -1.25,-0.6 1.25,0.6, height 0.25
FP-SML-P11MTT86-MFG [mm]
  rect 0.5x0.6 smd paste+0 mask+0: 1(-0.45,0) 2(0.45,0)
  silkscreen extent -1.37,-0.67 0.52,0.68, body extent -0.8,-0.43 0.8,0.43, height 0.25
FP-SOD123-IPC_A [mm]
  rect 1.557x0.742 smd paste+0 mask+0: 1(-1.7,0)
  rrect100% 1.557x0.742 smd paste+0 mask+0: 2(1.7,0)
  silkscreen extent -3.39,-0.77 1.32,0.78, body extent -2.98,-1.28 2.98,1.28, height 0.25
FP-SOD123-MFG [mm]
  rect 0.9x0.95 smd paste+0 mask+0: 1(-1.575,0) 2(1.575,0)
  silkscreen extent -2.75,-0.85 0.75,0.85, body extent -2.12,-0.95 2.12,0.95, height 0.25
FP-SOT25-IPC_A [mm]
  rect 1.707x0.616 smd paste+0 mask+0: 1(-1.201,0.95)
  rrect100% 1.707x0.616 smd paste+0 mask+0: 2(-1.201,0) 3(-1.201,-0.95) 4(1.201,-0.95) 5(1.201,0.95)
  silkscreen extent -3.08,-1.75 1.4,1.75, body extent -2.55,-2 2.55,2, height 0.25
FP-SOT883B-MFG [mm]
  rrect40% 0.4x0.25 smd paste-1000 mask+0: 1(-0.35,0.225) 2(-0.35,-0.225)
  rrect25% 0.4x0.7 smd paste-1000 mask+0: 3(0.35,0)
  silkscreen extent -0.97,-0.25 0.98,0.25, body extent -0.65,-0.45 0.65,0.45, height 0.25
FP-U_FL-R-SMT-1_10-MFG [mm]
  rect 1x1.05 smd paste-1000 mask+0: 1(0,1.525)
  rect 1.05x2.2 smd paste-1000 mask+0: 2(-1.475,0) 3(1.475,0)
  silkscreen extent -0.57,-1.38 0.58,-1.38, body extent -2.1,-1.48 2.1,2.15, height 0.25
FUSC1608X60N [mm]
  rect 0.92x0.99 smd: 1(-0.775,0) 2(0.775,0)
  silkscreen extent -0.06,-0.41 0.06,0.41
HRO_TYPE-C-31-M-12 [mm]
  rect 0.6x1.14 smd mask+0.05: A1_B12(-3.2,4.75) A4_B9(-2.4,4.75) B1_A12(3.2,4.75) B4_A9(2.4,4.75)
  rect 0.3x1.14 smd mask+0.05: A5(-1.25,4.75) A6(-0.25,4.75) A7(0.25,4.75) A8(1.25,4.75) B5(1.75,4.75) B6(0.75,4.75) B7(-0.75,4.75) B8(-1.75,4.75)
  oval 0.9x2 hole 0.6 slot 1.7 at 90 deg: S1(-4.325,4.17) S2(4.325,4.17)
  oval 0.9x1.7 hole 0.6 slot 1.4 at 90 deg: S3(-4.325,0) S4(4.325,0)
  round 0.6 hole 0.6 unplated: ""(-2.89,3.68) ""(2.89,3.68)
  silkscreen extent -4.47,-2.6 4.47,6.1, body extent -4.47,-2.6 4.47,5.31, height 3.31
JST-S2B-PH-K-S_V [mm] "THD, 2-Leads, Body 7.6x5.9mm, Pitch 2mm"
  rect 1.2x1.2 hole 0.7: 1(-1,2.45)
  round 1.2 hole 0.7: 2(1,2.45)
  silkscreen extent -2.95,-3.8 2.95,4.35, body extent -2.95,-3.8 2.95,3.8, height 4.8
PERE-SC-70-6_M [mm] "SOT23, 6-Leads, Body 2.25x1.35mm, Pitch 0.65mm, IPC Low Density"
  rect 1.05x0.45 smd: 1(-1.2,0.65) 2(-1.2,0) 3(-1.2,-0.65) 4(1.2,-0.65) 5(1.2,0) 6(1.2,0.65)
  silkscreen extent -1.32,-1.15 0.3,1.55, body extent -0.67,-1.12 0.67,1.13, height 1.1
QFN50P400X400X100-25N [mm]
  rect 0.84x0.26 smd: 1(-1.945,1.25) 2(-1.945,0.75) 3(-1.945,0.25) 4(-1.945,-0.25) 5(-1.945,-0.75) 6(-1.945,-1.25) 13(1.945,-1.25) 14(1.945,-0.75) 15(1.945,-0.25) 16(1.945,0.25) 17(1.945,0.75) 18(1.945,1.25)
  rect 0.26x0.84 smd: 7(-1.25,-1.945) 8(-0.75,-1.945) 9(-0.25,-1.945) 10(0.25,-1.945) 11(0.75,-1.945) 12(1.25,-1.945) 19(1.25,1.945) 20(0.75,1.945) 21(0.25,1.945) 22(-0.25,1.945) 23(-0.75,1.945) 24(-1.25,1.945)
  rect 2.6x2.6 smd paste-2: 25(0,0)
  silkscreen extent -2.89,-2.05 2.05,2.05
RESC1005X40X25LL05T10 [mm] "Chip Resistor, 2-Leads, Body 1.00x0.50mm, IPC High Density"
  rect 0.5x0.45 smd: 1(-0.375,0) 2(0.375,0)
  body extent -0.53,-0.27 0.53,0.28, height 0.4
RESC1005X40X25ML05T10 [mm] "Chip Resistor, 2-Leads, Body 1.00x0.50mm, IPC Low Density"
  rect 0.7x0.65 smd: 1(-0.475,0) 2(0.475,0)
  body extent -0.53,-0.27 0.53,0.28, height 0.4
RESC1005X40X25NL05T10 [mm] "Chip Resistor, 2-Leads, Body 1.00x0.50mm, IPC Medium Density"
  rect 0.6x0.55 smd: 1(-0.425,0) 2(0.425,0)
  body extent -0.53,-0.27 0.53,0.28, height 0.4
RESC2013X50X30LL20T20 [mm] "Chip Resistor, 2-Leads, Body 2.00x1.25mm, IPC High Density"
  rect 0.85x1.35 smd: 1(-0.825,0) 2(0.825,0)
  silkscreen extent -0.1,-0.58 0.1,0.58, body extent -1.1,-0.72 1.1,0.72, height 0.5
SOIC127P790X216-8N [mm]
  oval 1.6x0.6 smd: 1(-3.6,1.905) 2(-3.6,0.635) 3(-3.6,-0.635) 4(-3.6,-1.905) 5(3.6,-1.905) 6(3.6,-0.635) 7(3.6,0.635) 8(3.6,1.905)
  silkscreen extent -3.82,-2.65 2.47,2.82
SOT23-6 [mm]
  rect 0.55x1.2 smd: 1(-0.95,-1.3) 2(0,-1.3) 3(0.95,-1.3) 4(0.95,1.3) 5(0,1.3) 6(-0.95,1.3)
  silkscreen extent -1.13,-0.41 -1.06,-0.34
XCVR_L76 [mm]
  oval 1.8x0.8 smd paste-2 mask+0.05: 1(-4.85,4.4) 2(-4.85,3.3) 3(-4.85,2.2) 4(-4.85,1.1) 5(-4.85,0) 6(-4.85,-1.1) 7(-4.85,-2.2) 8(-4.85,-3.3) 9(-4.85,-4.4) 10(4.85,-4.4) 11(4.85,-3.3) 12(4.85,-2.2) 13(4.85,-1.1) 14(4.85,0) 15(4.85,1.1) 16(4.85,2.2) 17(4.85,3.3) 18(4.85,4.4)
  silkscreen extent -6.3,-5.13 3.95,5.3, body extent -4.85,-5.05 4.85,5.05, height 2.5
XCVR_NRF52840-QIAA-R [mm]
  rect 4.85x4.85 smd paste-3: 74(0,0)
  round 0.6 hole 0.305 mask+0: 74_1(-1.8,1.8) 74_2(-0.6,1.8) 74_3(0.6,1.8) 74_4(1.8,1.8) 74_5(-1.8,0.6) 74_6(-0.6,0.6) 74_7(0.6,0.6) 74_8(1.8,0.6) 74_9(-1.8,-0.6) 74_10(-0.6,-0.6) 74_11(0.6,-0.6) 74_12(1.8,-0.6) 74_13(-1.8,-1.8) 74_14(-0.6,-1.8) 74_15(0.6,-1.8) 74_16(1.8,-1.8)
  round 0.275 smd: A8(-1.25,3.25) A10(-0.75,3.25) A12(-0.25,3.25) A14(0.25,3.25) A16(0.75,3.25) A18(1.25,3.25) A20(1.75,3.25) A22(2.25,3.25) A23(2.75,3.25) AA24(3.25,-2.25) AB2(-2.75,-2.5) AC5(-2,-2.75) AC9(-1,-2.75) AC11(-0.5,-2.75) AC13(0,-2.75) AC15(0.5,-2.75) AC17(1,-2.75) AC19(1.5,-2.75) AC21(2,-2.75) AC24(3.25,-2.75) AD2(-2.75,-3.25) AD4(-2.25,-3.25) AD6(-1.75,-3.25) AD8(-1.25,-3.25) AD10(-0.75,-3.25) AD12(-0.25,-3.25) AD14(0.25,-3.25) AD16(0.75,-3.25) AD18(1.25,-3.25) AD20(1.75,-3.25) AD22(2.25,-3.25) AD23(2.75,-3.25) B1(-3.25,2.75) B3(-2.5,2.75) B5(-2,2.75) B7(-1.5,2.75) B9(-1,2.75) B11(-0.5,2.75) B13(0,2.75) B15(0.5,2.75) B17(1,2.75) B19(1.5,2.75) B24(3.25,2.75) C1(-3.25,2.25) D2(-2.75,2) D23(2.75,2) E24(3.25,1.75) F2(-2.75,1.5) F23(2.75,1.5) G1(-3.25,1.25) H2(-2.75,1) H23(2.75,1) J1(-3.25,0.75) J24(3.25,0.75) K2(-2.75,0.5) L1(-3.25,0.25) L24(3.25,0.25) M2(-2.75,0) N1(-3.25,-0.25) N24(3.25,-0.25) P2(-2.75,-0.5) P23(2.75,-0.5) R1(-3.25,-0.75) R24(3.25,-0.75) T2(-2.75,-1) T23(2.75,-1) U1(-3.25,-1.25) U24(3.25,-1.25) V23(2.75,-1.5) W1(-3.25,-1.75) W24(3.25,-1.75) Y2(-2.75,-2) Y23(2.75,-2)
  silkscreen extent -5.04,-3.5 3.5,3.5, body extent -3.5,-3.5 3.5,3.5, height 0.85

## Part data
C1: library part CMP-2008-03720-2, "Ceramic Capacitor for Automotive 47nF ±10% 25VDC X7R 0402 Paper T/R", Capacitance=47nF, Case Code (Imperial)=0402, Case Code (Metric)=1005, Dielectric=X7R, Max Operating Temperature=125°C, Min Operating Temperature=-55°C, Package Quantity=1, Ratings=AEC-Q200, Tolerance=10%, Voltage=25V, Case/Package=0402, Depth=0.5mm, Height=0.5mm, Length=1mm, Mount="Surface Mount", Packaging="Tape and Reel", Radiation Hardening=No, REACH SVHC="No SVHC", Termination=SMD/SMT, Thickness=0.022inch, Voltage Rating=25V, Voltage Rating (DC)=25V, Width=0.02inch
C2 C33: library part CMP-1662-00020-1, "Chip Capacitor, 1 uF, +/- 10%, 6.3 V, -55 to 85 degC, 0402 (1005 Metric), RoHS, Tape and Reel", Capacitance="1 uF", Case Code (Imperial)=0402, Case Code (Metric)=1005, Max Operating Temperature="85 degC", Min Operating Temperature="-55 degC", Package Quantity=10000, Tolerance=10%, Type (Capacitors)=X5R, Voltage Rating="6.3 V", Voltage Rating (DC)="3 V", Case/Package=0402, ComponentLink1Description="Manufacturer URL", ComponentLink1URL=http://www.murata.com/, ComponentLink2Description=Datasheet, ComponentLink2URL=http://psearch.en.murata.com/capacitor/product/GRM155R60J105KE19%23.pdf, DatasheetVersion=08/2016, Height="0.5 mm", Length="1 mm", Mount="Surface Mount", Mounting Technology="Surface Mount", PackageDescription="2-Pin Surface Mount Device, Body 1 x 0.5 mm", Packaging="Tape and Reel", PartNumber=GRM155R60J105KE19D, Pins=2, Radiation Hardening=No, REACH SVHC="No SVHC", RoHSCompliant=true, Width="0.5 mm"
C4: library part CMP-2008-03694-3, "Ceramic Capacitor for Automotive 100pF ±5% 50VDC C0G 0402 Paper T/R", Capacitance=100pF, Case Code (Imperial)=0402, Case Code (Metric)=1005, Dielectric=C0G, Max Operating Temperature=125°C, Min Operating Temperature=-55°C, Package Quantity=10000, Ratings=AEC-Q200, Tolerance=5%, Voltage=50V, Case/Package=0402, Depth=0.5mm, Height=0.5mm, Lead Free="Lead Free", Length=1mm, Mount="Surface Mount", Packaging="Tape and Reel", Radiation Hardening=No, REACH SVHC="No SVHC", Termination=SMD/SMT, Thickness=0.022inch, Voltage Rating=50V, Voltage Rating (DC)=50V, Weight=0.000212oz, Width=0.02inch
C5: library part CMP-06035-013155-1, "Ceramic Capacitor for Automotive 820pF ±5% 50VDC C0G 0402 Paper T/R"
C8 C31: library part CMP-2000-06332-1, "Chip Capacitor, 10 nF, 16 V, 10%, -55 to 125 degC, 0402 (1005 Metric), RoHS, Tape and Reel", Capacitance=10000pF, Case Size/Dimension=0402, Dielectric=X7R, Manufacturer=Murata, Package Description="2-Pin Surface Mount Device, Body 1 x 0.5 mm", Rated Voltage=16V, Tolerance (%)=±10%, Datasheet URL=http://psearch.en.murata.com/capacitor/product/GRM155R71C103KA01%23.pdf, Datasheet Version=06/2016, Manufacturer URL=http://www.murata.com/, Mounting Technology=SurfaceMount, Package Reference=0402
C9 C13 C18 C19 C26 C27 C28 C29 C30 C34 C35 C48 C49 C50 C52: library part CMP-03422-000607-1, "CAP CER 0.1UF 25V X5R 0402", Capacitance="100 nF", Manufacturer=YAGEO, Package=CC0402, Temperature="-55°C to +125°C", Temperature Characteristic=X5R, Temperature Coefficient=30ppm/°C, Temperature Range High=+125°C, Temperature Range Low=-55°C, Tolerance=0.1, Voltage Rating="25 V", Automotive=No, Automotive Grade=NA, Category=Cap, ComponentLink2Description=Datasheet, ComponentLink2URL=http://www.yageo.com/documents/recent/UPY-GP_NP0_16V-to-50V_16.pdf, Device Class L1="Passive Components", Device Class L2=Capacitors, Device Class L3="Ceramic Capacitors", Digikey Description="CAP CER 0.1UF 25V X5R 0402", Footprint Url=http://www.yageo.com/exep/pages/download/literatures/UPY-C_GEN_24.pdf, Height=0.55mm, Ipc Land Pattern Name=CAPC10050X50, Lead Free=Yes, Manufacturer Part Number=CC0402KRX5R8BB104, Material=Ceramic, Mouser Description="Multilayer Ceramic Capacitors MLCC - SMD/SMT 100nF 25V X5R 10%", Octopart=https://octopart.com/cc0402krx5r8bb104-yageo-20779263, RoHS=TRUE
C11 C12 C15 C20 C21: library part CMP-06035-003573-1, "Chip Multilayer Ceramic Capacitors for General Purpose, 0402, 4.7uF, X5R, 15%, 20%, 10V", Capacitance=4.7uF, Case Code (Imperial)=0402, Case Code (Metric)=1005, Max Operating Temperature=85°C, Min Operating Temperature=-55°C, Tolerance=20%, Voltage Rating=10V, Case/Package=0402, Mount="Surface Mount", Packaging="Tape and Reel"
C14 C43 C51: library part CMP-2000-06337-3, "Chip Multilayer Ceramic Capacitors for General Purpose, 0603, 22uF, X5R, 15%, 20%, 10V", Capacitance=22uF, Case Code (Imperial)=0603, Case Code (Metric)=1608, Dielectric=X5R, Max Operating Temperature=85°C, Min Operating Temperature=-55°C, Package Quantity=4000, Tolerance=20%, Voltage Rating=10V, Case/Package=0603, Depth=0.8mm, Height=0.8mm, Lead Free="Lead Free", Length=1.6mm, Material=Ceramic, Mount="Surface Mount", Packaging="Tape and Reel", REACH SVHC="No SVHC", Termination=SMD/SMT, Thickness=0.039inch, Voltage Rating (DC)=10V, Weight=0.000222oz, Width=0.8mm
C16 C17: library part CMP-2008-02740-1, Manufacturer="AVX Interconnect / Elco", Part Number=04026A120KAT2A
C22 C23: library part CMP-2008-03915-1, Manufacturer=Murata, Part Number=GRM1555C1H101JA01D
C24 C25: library part CMP-2008-03799-2, "Multi-Layer Ceramic Capacitor 12pF C0G  ±2% 0402 Paper T/R", Capacitance=12pF, Case Code (Imperial)=0402, Case Code (Metric)=1005, Dielectric=C0G, Max Operating Temperature=125°C, Min Operating Temperature=-55°C, Package Quantity=10000, Tolerance=2%, Voltage Rating=50V, Case/Package=0402, Depth=0.5mm, Height=0.5mm, Lead Free="Lead Free", Length=1mm, Mount="Surface Mount", Packaging="Tape and Reel", Radiation Hardening=No, Termination=SMD/SMT, Thickness=0.022inch, Voltage Rating (DC)=50V, Width=0.5mm
C32: library part CMP-2008-04600-1, Manufacturer=Murata, Part Number=GRM155R71C123KA01D
C36: library part CMP-06035-062171-1, "Ceramic Capacitor for Automotive 4pF ±0.25pF 50VDC C0G 0402 Paper T/R", Capacitance=4pF, Case Code (Imperial)=0402, Case Code (Metric)=1005, Dielectric=C0G, Max Operating Temperature=125°C, Min Operating Temperature=-55°C, Package Quantity=10000, Ratings=AEC-Q200, Voltage Rating=50V, Case/Package=0402, Height=0.5mm, Length=0.039inch, Mount="Surface Mount", Packaging="Tape and Reel", RoHS Compliant=Yes, Termination=SMD/SMT, Thickness=0.022inch, Voltage Rating (DC)=50V, Weight=0.000212oz, Width=0.02inch
C37 C38: library part CMP-2008-04640-1, Manufacturer=Murata, Part Number=GRM155R71H122KA01D
C39 C40: library part CMP-2008-03971-1, Manufacturer=Murata, Part Number=GRM1555C1E100JA01D
C41: library part CMP-06035-005738-1, "Ceramic Capacitor for Automotive 8pF ±0.25pF 50VDC C0G 0402 Paper T/R"
C42: library part CMP-2008-03956-2, "Chip Multilayer Ceramic Capacitors for General Purpose, 0402, 0.47uF, X6S, 22%, 10%, 6.3V", Capacitance=470nF, Case Code (Imperial)=0402, Case Code (Metric)=1005, Dielectric=X6S, Max Operating Temperature=105°C, Min Operating Temperature=-55°C, Package Quantity=10000, Tolerance=10%, Voltage Rating=6.3V, Case/Package=0402, Depth=0.5mm, Height=0.5mm, Lead Free="Lead Free", Length=1mm, Mount="Surface Mount", Packaging="Tape and Reel", Radiation Hardening=No, Termination=SMD/SMT, Thickness=0.022inch, Voltage Rating (DC)=6.3V, Width=0.02inch
C44 C45 C46 C47 C53: library part CMP-2006-02520-2, "Chip Multilayer Ceramic Capacitors for General Purpose, 0603, 10uF, X5R, 15%, 20%, 25V", Capacitance=10uF, Case Code (Imperial)=0603, Case Code (Metric)=1608, Dielectric=X5R, Max Operating Temperature=85°C, Min Operating Temperature=-55°C, Package Quantity=1, Resistor Type=Ceramic, Tolerance=20%, Voltage=25V, Case/Package=0603, Depth=0.8mm, Height=0.8mm, Lead Free="Lead Free", Length=1.6mm, Mount="Surface Mount", Number of Pins=2, Packaging="Tape and Reel", REACH SVHC="No SVHC", Termination=SMD/SMT, Thickness=0.031inch, Voltage Rating=25V, Voltage Rating (DC)=25V, Weight=0.000222oz, Width=0.031inch
C5210584: library part CMP-1502-03258-2, Color=Blue, Current=15A, Max Operating Temperature=105°C, Min Operating Temperature=-40°C, Voltage=300V, Contact Material=Brass, Contact Plating=Tin, Current Rating=15A, Height=13.4mm, Housing Material=Nylon, Lead Pitch=5mm, Length=7.5mm, Mount="Through Hole", NexarPartId=8917706, Number of Contacts=2, Number of Levels=1, Number of Pins=2, Number of Positions Per Level=2, Packaging=Box, Pitch=5.0038mm, Plating=Steel, REACH SVHC=Unknown, RoHS=Compliant, Stripping Length=-6mm, Termination=Screw, Voltage Rating=300V, Width=11.2mm, Wire Gauge (Max)=22AWG, Wire Gauge (Min)=14AWG, Wire/Cable Gauge=22AWG
D1 D2 D6 D7: library part CMP-12791-000005-1, "DIODE GEN PURP 100V 150MA SOD123", Capacitance=2pF, Forward Current=300mA, Manufacturer="Diodes Inc.", Manufacturer Part Number=1N4148W-13-F, Max Junction Temp=+150°C, Max Repetitive Reverse Voltage=100V, Max Surge Forward Current=1A, Package=SOD123, Peak Reverse Current=1uA, Temperature="-65°C to +150°C", Temperature Range Low=-65°C, Automotive=No, Category=Diode, ComponentLink2Description=Datasheet, ComponentLink2URL=https://upverter.com/datasheet/628e7d6fee5901eee6eef4567d1c3569f2cd3cde.pdf, Device Class L1="Discrete Semiconductors", Device Class L2=Diodes, Device Class L3="Rectifier Diodes", Digikey Description="DIODE GEN PURP 100V 150MA SOD123", Footprint Url=https://www.diodes.com/assets/Package-Files/SOD123.pdf, Height=1.45mm, Lead Free=Yes, Mouser Description="1N4148W Series 2 A 100 V 400 mW Surface Mount Fast Switching Diode - SOD-123", Octopart=https://octopart.com/1n4148w-13-f-diodes+inc.-2359612, Reverse Voltage=100V, RoHS=TRUE, Standoff Height=0mm, Temperature Range High=+150°C
D3 D10: library part CMP-2000-07126-2, "LED Green-Yellow  1006 SMD", Case Code (Imperial)=0402, Case Code (Metric)=1005, Color="Green Yellow", Forward Current=30mA, Forward Voltage=1.9V, Lens Color=Colorless, Max Operating Temperature=85°C, Min Operating Temperature=-40°C, Package Quantity=1, Power Rating=54mW, Test Current=1mA, Case/Package=0402, Dominant Wavelength=569nm, Height=0.25mm, Illumination Color="Green Yellow", Lead Free="Lead Free", Length=1mm, Lens Style=Diffused, Lens Transparency=Clear, Luminous Intensity=2.1mcd, Mount="Surface Mount", Number of LEDs=1, Number of Pins=2, Packaging="Tape and Reel", Radiation Hardening=No, REACH SVHC="No SVHC", RoHS Compliant=Yes, Viewing Angle=150°, Wavelength=569nm, Width=0.6mm
D4 D13: library part CMP-2000-07126-2, "LED Orange-red  1006 SMD", Case Code (Imperial)=0402, Case Code (Metric)=1005, Color="Orange Red", Forward Current=30mA, Forward Voltage=1.9V, Lens Color=Colorless, Max Operating Temperature=85°C, Min Operating Temperature=-40°C, Package Quantity=1, Power Rating=54mW, Test Current=1mA, Case/Package=0402, Dominant Wavelength=569nm, Height=0.25mm, Illumination Color="Orange Red", Lead Free="Lead Free", Length=1mm, Lens Style=Diffused, Lens Transparency=Clear, Luminous Intensity=2.1mcd, Mount="Surface Mount", Number of LEDs=1, Number of Pins=2, Packaging="Tape and Reel", Radiation Hardening=No, REACH SVHC="No SVHC", RoHS Compliant=Yes, Series=PicoLED™, Viewing Angle=150°, Wavelength=569nm, Width=0.6mm
D5: library part CMP-2000-07126-2, "LED BLUE  1006 SMD", Case Code (Imperial)=0402, Case Code (Metric)=1005, Color=Blue, Forward Current=30mA, Forward Voltage=1.9V, Lens Color=Colorless, Max Operating Temperature=85°C, Min Operating Temperature=-40°C, Package Quantity=1, Power Rating=54mW, Test Current=1mA, Case/Package=0402, Dominant Wavelength=465nm, Height=0.25mm, Illumination Color=Blue, Lead Free="Lead Free", Length=1mm, Lens Style=Diffused, Lens Transparency=Clear, Luminous Intensity=2.1mcd, Mount="Surface Mount", Number of LEDs=1, Number of Pins=2, Packaging="Tape and Reel", Radiation Hardening=No, REACH SVHC="No SVHC", RoHS Compliant=Yes, Series=PicoLED™, Viewing Angle=150°, Wavelength=569nm, Width=0.6mm
D8: library part CMP-0303-00003-3, "DIODE SCHOTTKY 40V 1A SOD123", Average Rectified Current=1A, Capacitance=110pF, Case/Package=SOD-123-2, Forward Voltage=450mV, Max Forward Surge Current (Ifsm)=25A, Max Operating Temperature=125°C, Max Power Dissipation=450mW, Max Repetitive Reverse Voltage (Vrrm)=40V, Min Operating Temperature=-65°C, Package Quantity=3000, Peak Reverse Current=50uA, Contact Plating=Tin, Current Rating=1A, Element Configuration=Single, Forward Current=1A, Height=1.25mm, Lead Free="Lead Free", Length=2.85mm, Max Reverse Voltage (DC)=40V, Number of Pins=2, Output Current=1A, Packaging="Tape and Reel", Peak Non-Repetitive Surge Current=25A, Polarity=Standard, Radiation Hardening=No, REACH SVHC="No SVHC", Termination=SMD/SMT, Voltage Rating (DC)=40V, Weight=0.000353oz, Width=1.7mm
D9: library part CMP-04989-000015-1, "TVS DIODE 3.6V 8.8V 10USON", Clamping Voltage=8.8V, Max Operating Temperature=125°C, Min Breakdown Voltage=5.5V, Min Operating Temperature=-40°C, Operating Supply Voltage=3.6V, Peak Pulse Current=5A, Peak Pulse Power=17W, Power Line Protection=No, Resistor Type=Zener, Interface=USB, Lead Free="Lead Free", Mount="Surface Mount", Number of Bidirectional Channels=4, Number of Channels=4, Number of Pins=10, Packaging="Cut Tape", REACH SVHC="No SVHC", Reverse Standoff Voltage=3.6V, RoHS Compliant=Yes
D11: library part CMP-02577-000003-2, "TVS DIODE 15V 24.4V DO214AA", Breakdown Voltage=16.7V, Case/Package=SMB, Clamping Voltage=24.4V, Leakage Current=1uA, Max Breakdown Voltage=18.5V, Max Operating Temperature=150°C, Max Power Dissipation=600W, Max Surge Current=24.6A, Min Operating Temperature=-55°C, Operating Supply Voltage=15V, Package Quantity=750, Test Current=1mA, Direction=Bidirectional, Element Configuration=Single, Height=2.24mm, Lead Free="Lead Free", Length=4.57mm, Max Reverse Leakage Current=1uA, Min Breakdown Voltage=16.7V, Mount="Surface Mount", Number of Channels=1, Number of Elements=1, Number of Pins=2, Packaging="Tape and Reel", Peak Pulse Current=24.6A, Peak Pulse Power=600W, Polarity=Bidirectional, Power Dissipation=600W, Radiation Hardening=No, Reverse Breakdown Voltage=16.7V, Reverse Standoff Voltage=15V, Termination=SMD/SMT, Voltage Rating (DC)=15V, Width=3.94mm
D12: library part CMP-04549-000001-1, "DIODE SCHOTTKY 40V 200MA 0603", Forward Current=0.2A, Manufacturer=AVX, Max Repetitive Reverse Voltage=40V, Max Surge Forward Current=2A, Package=SD0603, Temperature="-55°C to +125°C", Temperature Range High=+125°C, Temperature Range Low=-55°C, Automotive=No, Category=Diode, ComponentLink2Description=Datasheet, ComponentLink2URL=http://datasheets.avx.com/schottky.pdf, Device Class L1="Discrete Semiconductors", Device Class L2=Diodes, Device Class L3="Schottky Diodes", Digikey Description="DIODE SCHOTTKY 40V 200MA 0603", Height=0.86mm, Lead Free=Yes, Manufacturer Part Number=SD0603S040S0R2, Mouser Description="Schottky Diodes & Rectifiers 40volts 0.2A SIZE 0603", Octopart=https://octopart.com/sd0603s040s0r2-avx-24931763, Reverse Voltage=40V, RoHS=TRUE
D14: library part CMP-2000-07126-2, "LED YELLOW 1006 SMD", Case Code (Imperial)=0402, Case Code (Metric)=1005, Color=Green, Forward Current=20mA, Forward Voltage=1.9V, Lens Color=Colorless, Max Operating Temperature=85°C, Min Operating Temperature=-40°C, Package Quantity=1, Power Rating=54mW, Test Current=1mA, Case/Package=0402, Dominant Wavelength=569nm, Height=0.25mm, Illumination Color=Green, Lead Free="Lead Free", Length=1mm, Lens Style=Diffused, Lens Transparency=Clear, Luminous Intensity=2.1mcd, Mount="Surface Mount", Number of LEDs=1, Number of Pins=2, Packaging="Tape and Reel", Radiation Hardening=No, REACH SVHC="No SVHC", RoHS Compliant=Yes, Series=PicoLED™, Viewing Angle=150°, Wavelength=569nm, Width=0.6mm
F1 F2: library part 0686F1000-01, "0603 SMT Fuse", Package="0603 Bel Fuse Inc.", Availability=Unavailable, MF="Bel Fuse", Mouser-Purchase-URL=https://snapeda.com/shop?store=Mouser&id=4616119, MP=0686F1000-01, Price=None, SnapEDA_Link=https://www.snapeda.com/parts/0686F1000-01/Bel%20Fuse/view-part/4616119/?ref=snap
FB1 FB2 FB3 FB4: library part CMP-0686-00181-5, "Chip Ferrite Bead, 0402, 1000Ω @ 100MHz, 0.65Ω, 25%, 300mA", Case Code (Imperial)=0402, Case Code (Metric)=1005, Current Rating=300mA, DC Current=200mA, DC Resistance (DCR)=650mR, DC Resistance-Max=1R, Frequency=100MHz, Max Operating Temperature=125°C, Min Operating Temperature=-55°C, Package Quantity=1, Tolerance=25%, Case/Package=0402, Core Material=Ferrite, Depth=0.55mm, Height=0.5mm, Impedance=1kR, Lead Free="Lead Free", Length=1mm, Material=Ferrite, Max Current Rating=300mA, Max DC Current=200mA, Military Standard=Not, Number of Circuits=1, Number of Lines=1, Number of Pins=2, Packaging="Tape and Reel", Radiation Hardening=No, REACH SVHC="No SVHC", RoHS Compliant=Yes, Series=BLM15AG_SN, Shielding=Unshielded, Termination=SMD/SMT, Test Frequency=100MHz, Width=0.5mm
GPIO_PINS SWD: library part CMP-1502-01064-2, Color=Black, Contact Resistance=20mΩ, Current Rating=3A, Max Operating Temperature=105°C, Min Operating Temperature=-40°C, Operating Supply Voltage=250V, Connector Type="Male Pin", Contact Material=Copper, Contact Mating Length=5.9944mm, Contact Plating=Gold, Gender=Male, Height=8.89mm, Lead Free="Lead Free", Lead Pitch=2.54mm, Mount="Through Hole", NexarPartId=32855522, Number of Contacts=4, Number of Pins=4, Number of Positions=4, Number of Rows=1, Orientation=Vertical, Packaging=Bulk, Pitch=2.54mm, REACH SVHC=Unknown, RoHS=Compliant, Termination=Solder, Voltage Rating=250V
J1: "<b>500mA linear li-ion battery charger</b><p> tp4057 actual charge current to 500ma, dual-lamp indication, reverse battery protection.<br> Alternative to MAX1551 or MAX1555 (not compatible!)<p> Datasheet from TP micro: <br> http://www.tpmicro.com/datasheet/TP4057Ver1.0_preview.pdf <br> http://www.tp-asic.com/te_product_a/2009-05-20/33.chtml", Package=None, Availability="Not in stock", Check_prices=https://www.snapeda.com/parts/TP4057/Top+Power/view-part/?ref=eda, MF=toppower, MP=TP4057, Price=None, SnapEDA_Link=https://www.snapeda.com/parts/TP4057/Top+Power/view-part/?ref=snap
J6: "USB Connectors 24 Receptacle 1 8.94*7.3mm RoHS", Package=Package, Availability="Not in stock", Check_prices=https://www.snapeda.com/parts/TYPE-C-31-M-12/HRO+Electronics+Co.%252C+Ltd./view-part/?ref=eda, MF="HRO Electronics Co., Ltd.", MP=TYPE-C-31-M-12, Price=None, SnapEDA_Link=https://www.snapeda.com/parts/TYPE-C-31-M-12/HRO+Electronics+Co.%252C+Ltd./view-part/?ref=snap
L1 L2: library part CMP-06042-016407-1, "FIXED IND 10UH 50MA 900 MOHM SMD", Case Code (Imperial)=0603, Case Code (Metric)=1608, Current Rating=50mA, DC Resistance (DCR)=1.17R, Inductance=10uH, Max Operating Temperature=125°C, Min Operating Temperature=-55°C, Package Quantity=4000, Self Resonant Frequency=30MHz, Test Frequency=1MHz, Tolerance=20%, Case/Package=0603, Core Material=Ferrite, DC Current=50mA, Depth=0.9mm, Height=0.9mm, Height - Seated (Max)=0.035inch, Lead Free="Lead Free", Length=0.063inch, Max DC Current=50mA, Military Standard=Not, Mount="Surface Mount", Packaging="Tape and Reel", Radiation Hardening=No, RoHS Compliant=Yes, Saturation Current=50mA, Series=LQM18F, Shielding=Shielded, Termination=SMD/SMT, Width=0.031inch
L3 L7 L10: library part CMP-06042-009484-1, "Multilayer type Inductor for Automotive 15nH ±3% 0.32Ω 450mA 0402", Case Code (Imperial)=0402, Case Code (Metric)=1005, Current Rating=450mA, DC Resistance (DCR)=320mR, Inductance=15nH, Max Operating Temperature=125°C, Min Operating Temperature=-55°C, Ratings=AEC-Q200, Self Resonant Frequency=2.5GHz, Test Frequency=100MHz, Tolerance=3%, Case/Package=0402, Core Material=Air, Mount="Surface Mount", Packaging="Cut Tape", Shielding=Unshielded
L4: library part CMP-06042-016446-1, "FIXED IND 90NH 520MA 240 MOHM"
L6 L9: library part CMP-08253-000227-1, "Shielded Multilayer Inductor 2.2uH ±20% 1000mA 212.5mΩ SMD 0806", Case Code (Imperial)=0806, Case Code (Metric)=2016, Current Rating=1A, DC Resistance (DCR)=212.5mR, Inductance=2.2uH, Max Operating Temperature=125°C, Min Operating Temperature=-40°C, Package Quantity=3000, Test Frequency=2MHz, Tolerance=20%, Case/Package=0806, Core Material=Ferrite, Height - Seated (Max)=0.039inch, Lead Free="Lead Free", Length=0.079inch, Mount="Surface Mount", Packaging="Cut Tape", RoHS Compliant=Yes, Shielding=Shielded, Width=0.063inch
L8: library part CMP-06042-010497-1, "Film type RF Inductor 4nH ±0.1nH 350mA 0.4Ω 0201 (0603)", Case Code (Imperial)=0201, Case Code (Metric)=0603, Current Rating=350mA, DC Resistance (DCR)=400mR, Inductance=4nH, Max Operating Temperature=125°C, Min Operating Temperature=-55°C, Package Quantity=15000, Resistor Type="Thin Film", Self Resonant Frequency=5.3GHz, Test Frequency=500MHz, Case/Package=0201, Core Material=Non-Magnetic, DC Current=350mA, Depth=0.33mm, Height - Seated (Max)=0.013inch, Length=0.024inch, Military Standard=Not, Mount="Surface Mount", Packaging="Tape and Reel", Shielding=Unshielded, Width=0.012inch
L11: library part CMP-06042-003301-1, "Multilayer type Inductor for Automotive 47nH ±5% 0.72Ω 300mA 0402", Case Code (Imperial)=0402, Case Code (Metric)=1005, Current Rating=200mA, DC Resistance (DCR)=720mR, Inductance=47nH, Max Operating Temperature=125°C, Min Operating Temperature=-55°C, Package Quantity=10000, Self Resonant Frequency=1GHz, Test Frequency=100MHz, Tolerance=5%, Case/Package=0402, Core Material=Air, Height=0.5mm, Height - Seated (Max)=0.022inch, Length=0.039inch, Max DC Current=200mA, Mount="Surface Mount", Packaging="Tape and Reel", Q Factor=8, Shielding=Unshielded, Termination=SMD/SMT, Width=0.02inch
Q1: library part CMP-14406-000022-1, "TRANS NPN 40V 0.2A 3DFN"
Q2 Q3 Q4: library part CMP-00030-42864886-1, "18V 7A 1W 22mΩ@4.5V,6.5A P Channel SOT-23-3L MOSFETs ROHS", Case/Package=SOT-23-3, Continuous Drain Current (ID)=-2.2A, Drain to Source Breakdown Voltage=-20V, Drain to Source Resistance=100mΩ, Gate to Source Voltage (Vgs)=8V, Input Capacitance=375pF, Max Operating Temperature=150°C, Max Power Dissipation=700mW, Min Operating Temperature=-55°C, Resistance=100MΩ, Threshold Voltage=-950mV, Drain to Source Voltage (Vdss)=-20V, Element Configuration=Single, Fall Time=40ns, Height=1.02mm, Lead Free="Lead Free", Length=3.04mm, Mount="Surface Mount", NexarPartId=42864886, Nominal Vgs=-950mV, Number of Channels=1, Number of Elements=1, Number of Pins=3, Power Dissipation=700mW, Radiation Hardening=No, Rds On Max=100mΩ, REACH SVHC=Unknown, Rise Time=40ns, RoHS=Compliant, Schedule B="8541210080, 8541210080", Turn-Off Delay Time=30ns, Turn-On Delay Time=20ns, Weight=1.437803g, Width=1.4mm
R1 R2 R9 R10 R13 R24 R25 R26 R27 R32: library part CMP-2001-03953-1, Manufacturer="Vishay Dale", Part Number=CRCW080549K9FKTA
R3 R4 R5 R29: library part CMP-2002-07985-1, Manufacturer="Yageo / Phycomp", Part Number=RC0402JR-07330RL
R6 R19 R20: library part CMP-2000-04815-2, "RES SMD 0 OHM JUMPER 1/10W 0603", Case Code (Imperial)=0603, Case Code (Metric)=1608, Max Operating Temperature=155°C, Max Power Dissipation=100mW, Min Operating Temperature=-55°C, Package Quantity=1, Resistance=0R, Resistor Type="Thick Film", Temperature Coefficient=200ppm/°C, Tolerance=1%, Voltage Rating=50V, Case/Package=0603, Features="Moisture Resistant", Height=0.022inch, Lead Free="Lead Free", Length=0.063inch, Number of Terminations=2, Packaging="Tape and Reel", Power Rating=100mW, Series=AC, Size Code=0603, Termination=SMD/SMT, Width=0.031inch
R7 R8 R11 R12: library part CMP-2002-01759-2, "RES 100Ω ±5% 0.063W 0402", Case Code (Imperial)=0402, Case Code (Metric)=1005, Max Operating Temperature=155°C, Max Power Dissipation=63mW, Min Operating Temperature=-55°C, Power Rating=62.5mW, Resistance=100R, Resistor Type="Thick Film", Temperature Coefficient=100ppm/°C, Tolerance=5%, Voltage Rating=50V, Case/Package=0402, Construction=Rectangular, Depth=0.5mm, Features="Moisture Resistant", Height=0.015inch, Length=1mm, Military Standard=Not, Number of Terminations=2, Packaging="Tape and Reel", RoHS Compliant=Yes, Series=AC, Termination=SMD/SMT, Weight=2.3E-05oz, Width=0.5mm
R14: library part CMP-03412-047392-1, "Anti-Sulfurated Chip Resistors Automotive Grade 1kΩ 5% 100ppm/°C 0402", Case Code (Imperial)=0402, Case Code (Metric)=1005, Max Operating Temperature=155°C, Max Power Dissipation=63mW, Min Operating Temperature=-55°C, Package Quantity=10000, Power Rating=62.5mW, Resistance=1kR, Resistor Type="Thick Film", Temperature Coefficient=100ppm/°C, Tolerance=5%, Voltage Rating=50V, Case/Package=0402, Features="Moisture Resistant", Height=0.015inch, Length=0.039inch, Number of Terminations=2, Packaging="Tape and Reel", RoHS Compliant=Yes, Series=AF, Termination=SMD/SMT, Weight=2.3E-05oz, Width=0.5mm
R15 R16: library part CMP-2002-07344-1, Manufacturer="Yageo / Phycomp", Part Number=RC0402FR-07100RL
R17 R18: library part CMP-2002-08025-1, Manufacturer="Yageo / Phycomp", Part Number=RC0402JR-075K1L
R21: library part CMP-2002-07490-1, Manufacturer="Yageo / Phycomp", Part Number=RC0402FR-071ML
R22 R23: library part CMP-2002-07520-1, Manufacturer="Yageo / Phycomp", Part Number=RC0402FR-0722RL